# EAGLE board EHMOS (EAGLE 7.4.0)

Size 100 x 80 mm. Coordinates in mm from the lower left corner, seen from the top.
Outline: 0,0 100,0 100,80 0,80 0,0
Copper layers (1*16): Top 0.035mm / dielectric 1.5mm / Bottom 0.035mm
Design rules "default": minimum track width 10mil, minimum drill 24mil, track to track 8mil, track to pad 8mil, pad to pad 8mil, via to via 8mil, smd to smd 8mil, copper to edge 40mil, drill to drill 8mil, minimum pad ring 10mil, minimum via ring 8mil, stop-mask expansion 4mil, vias tented up to drill 0mil, thermal gap 10mil

## Footprints (pad centres in the part's own frame; a part is rotated, then mirrored left to right if it is on the bottom)
C1206 = smd 1.6 x 1.8: 1 -1.4,0; 2 1.4,0
B2430UNI = drill 1.118 pad 2.54 octagon: + 3.81,14.605; +@1 -3.81,14.605; +@2 -5.08,12.065; +@3 5.08,12.065; - 0,-5.715; -@1 0,-8.255 | drill 1.803 pad 3.81 octagon: +@4 0,12.065
1X07SMD = smd 1.016 x 3.302: 1 -1.27,1.27; 2 1.27,-1.27; 3 3.81,1.27; 4 6.35,-1.27; 5 8.89,1.27; 6 11.43,-1.27; 7 13.97,1.27
R1206 = smd 1.6 x 1.803: 1 -1.422,0; 2 1.422,0
SOT223 = smd 1.219 x 2.235: 1 -2.311,-3.099; 2 0,-3.099; 3 2.311,-3.099 | smd 3.6 x 2.2: 4 0,3.099
LM3940_PACK = smd 1.5 x 4: 1 -2.5,-8.02; 2 0,-8.02; 3 2.5,-8.02
ESP12Q = drill 0.7 offset: ADC -7.1,3.8; CH_PD -7.1,1.8; CS0 -5.165,-9.005; GND 6.9,-8.2; GPIO0 6.9,-2.2; GPIO2 6.9,-4.2; GPIO4 6.9,1.8; GPIO5 6.9,-0.2; GPIO9 -1.165,-9.005; GPIO10 0.835,-9.005; GPIO12 -7.1,-4.2; GPIO13 -7.1,-6.2; GPIO14 -7.1,-2.2; GPIO15 6.9,-6.2; GPIO16 -7.1,-0.2; MISO -3.165,-9.005; MOSI 2.835,-9.005; RESET -7.1,5.8; RX 6.9,3.8; SCLK 4.835,-9.005; TX 6.9,5.8; VCC -7.1,-8.2
1206 = smd 1.6 x 1.8: 1 -1.4,0; 2 1.4,0
32005-201 = smd 3.1 x 0.5: 1 3,1.6; 2 3,0.8; 3 3,0; 4 3,-0.8; 5 3,-1.6 | smd 2.5 x 2: M1 -3,-4.45; M2 -3,4.45 | smd 3.3 x 2: M3 2.9,4.45; M4 2.9,-4.45 | hole 0.9: 0,2.2; 0,-2.2

## Placement (x,y rotation side)
C1  100n  [C1206]  -43.18,48.26 0 top  (outside the outline)
C2  100n  [C1206]  -16.51,57.15 0 top  (outside the outline)
G1  B2430UNI  [B2430UNI]  16,68 270 bottom
JP1  [1X07SMD]  -36.83,48.26 0 top  (outside the outline)
R1  ?  [R1206]  -34.29,57.15 0 top  (outside the outline)
R2  ?  [R1206]  -39.37,57.15 0 top  (outside the outline)
R4  100k  [R1206]  -22.86,57.15 0 top  (outside the outline)
R5  100k  [R1206]  -29.21,57.15 0 top  (outside the outline)
R9  ?  [R1206]  -44.45,57.15 0 top  (outside the outline)
R10  150  [R1206]  -15.24,63.5 0 top  (outside the outline)
T1  [SOT223]  -45.72,34.29 0 top  (outside the outline)
T2  [SOT223]  -16.51,49.53 0 top  (outside the outline)
U$1  LM3940  [LM3940_PACK]  33,57 180 bottom
U$2  ESP12Q  [ESP12Q]  19,37 180 top
U$5  47u  [1206]  -20.32,63.5 0 top  (outside the outline)
X1  MINI-USB-SCHIELD-32005-201  [32005-201]  33.17,74.56 270 bottom

## Library data of the parts
C1 C2 R1 R2 R4 R5 R9 R10 = rcl
G1 = battery
JP1 = pinhead
T1 T2 = zetex; OC_FARNELL: unknown; OC_NEWARK: unknown
U$1 = lm3940
U$2 = esp826612q
U$5 = CAP_TANTAL_1206
X1 = con-cypressindustries; OC_FARNELL: unknown; OC_NEWARK: unknown

## Nets
+3V3: C1.1 JP1.5 R1.2 R4.2 R5.2 R9.2 U$1.3
+5V: C2.1 U$1.1 U$5.1
ADC: U$2.ADC
CH_PD: U$2.CH_PD
CLK: U$2.GPIO10
CS: U$2.CS0
D0: U$2.MISO
D1: U$2.MOSI
D+: X1.3
D-: X1.2
GND: C1.2 C2.2 JP1.3 JP1.4 T1.3 T2.3 U$2.GND U$5.2 X1.5
GPIO0: U$2.GPIO0
GPIO2: U$2.GPIO2
GPIO4: U$2.GPIO5
GPIO5: U$2.GPIO4
GPIO9: U$2.SCLK
GPIO10: U$2.GPIO9
GPIO12: U$2.GPIO12
GPIO13: U$2.GPIO13
GPIO14: U$2.GPIO14
GPIO15: U$2.GPIO15
GPIO16: U$2.GPIO16
ID: X1.4
N$1: R2.1 T2.1
N$3: X1.1
N$6: R10.2
RESET: U$2.RESET
RX_ICP: JP1.2 R5.1
RX_WLAN: U$2.RX
SW_SENSOR: R2.2
SW_WLAN: R10.1 T1.1
SWCLK: JP1.7
SWDIO: JP1.6
TX_WLAN: U$2.TX
TXD_ICP: JP1.1 R4.1
VDD_SENSOR: R1.1 T2.2 T2.4
VDD_WLAN: R9.1 T1.2 T1.4 U$2.VCC

## Tracks (layer width: path | path; a pad name or v marks a point on that pad's centre or on a via)
+3V3  (6 unrouted)
+5V  (2 unrouted)
GND  (8 unrouted)
N$1  (1 unrouted)
RX_ICP  (1 unrouted)
SW_WLAN  (1 unrouted)
TXD_ICP  (1 unrouted)
VDD_SENSOR  (2 unrouted)
VDD_WLAN  (3 unrouted)